# Altium PCB PCB2.PcbDoc
Units mm, origin at the board's own origin, x right, y up, seen from the top; angles counter-clockwise.
Board outline 152.4 x 101.6 mm, 2 copper layers (Top Layer, Bottom Layer); 30 components, 23 nets, 106 pads, 6 vias.
Unrouted connection lines stored in the file: 1.
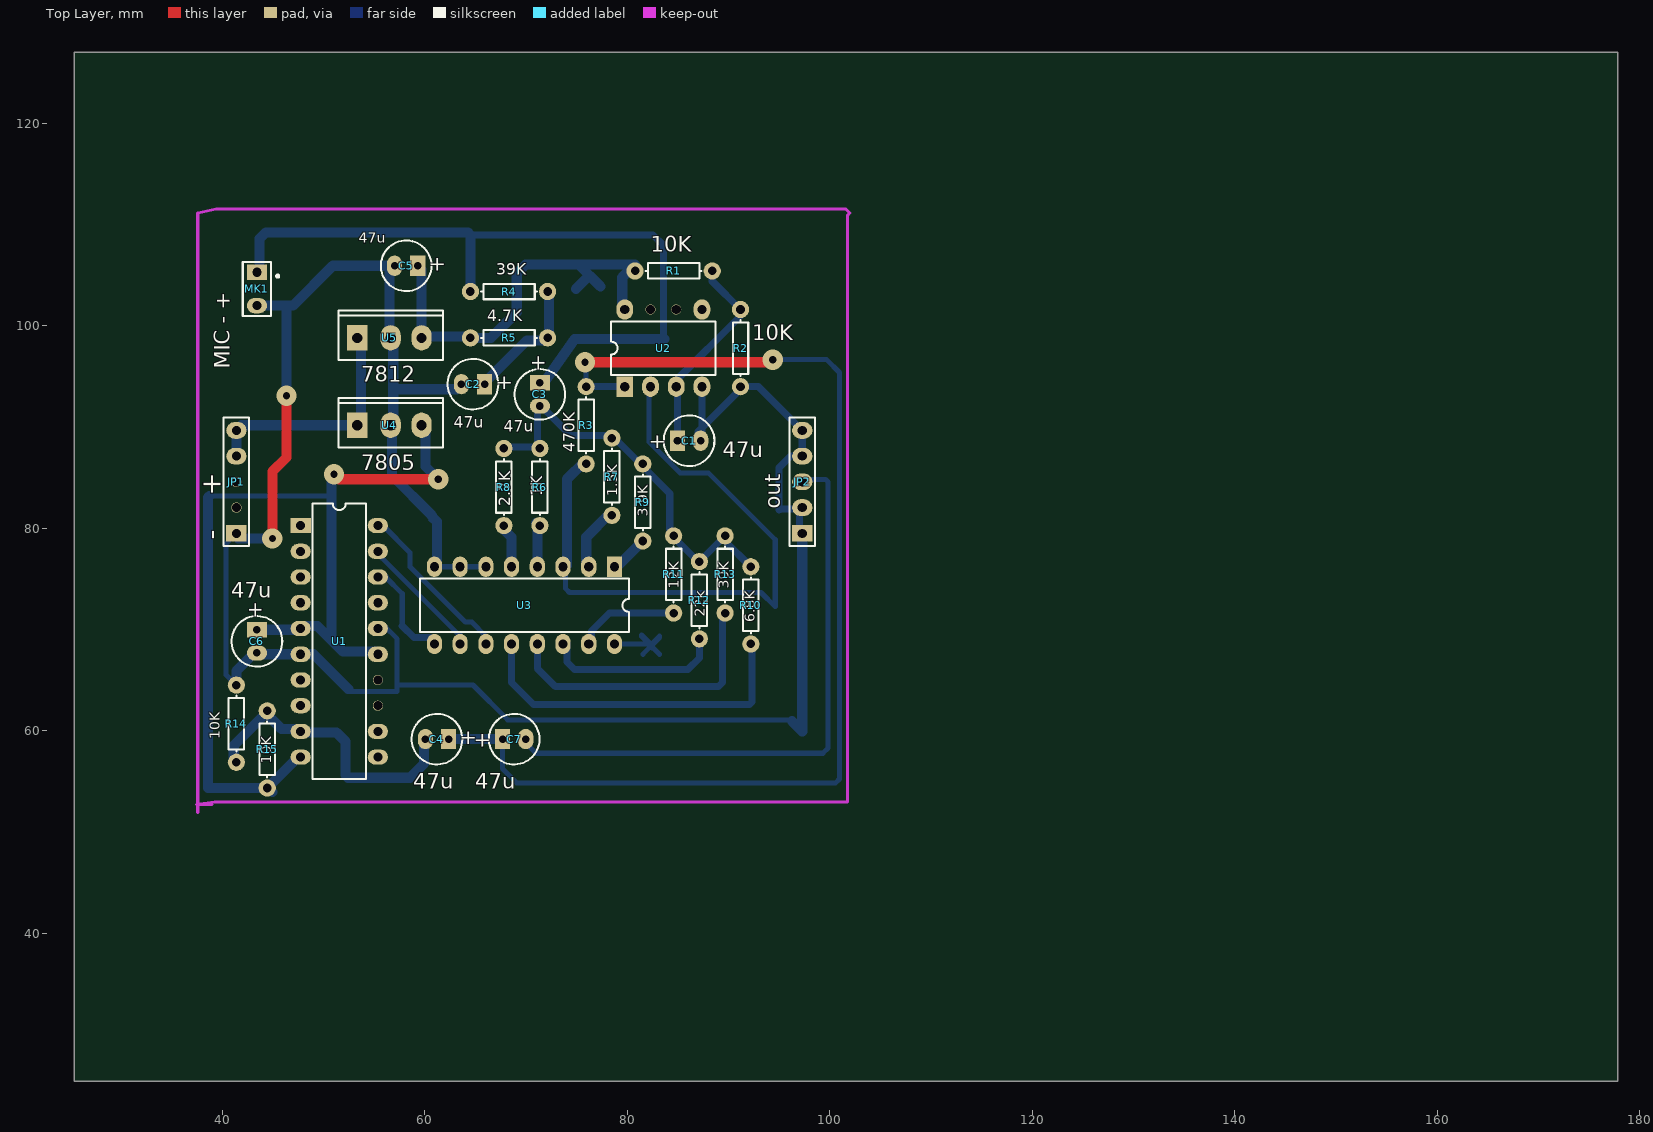
[diagram p0: Top Layer view]
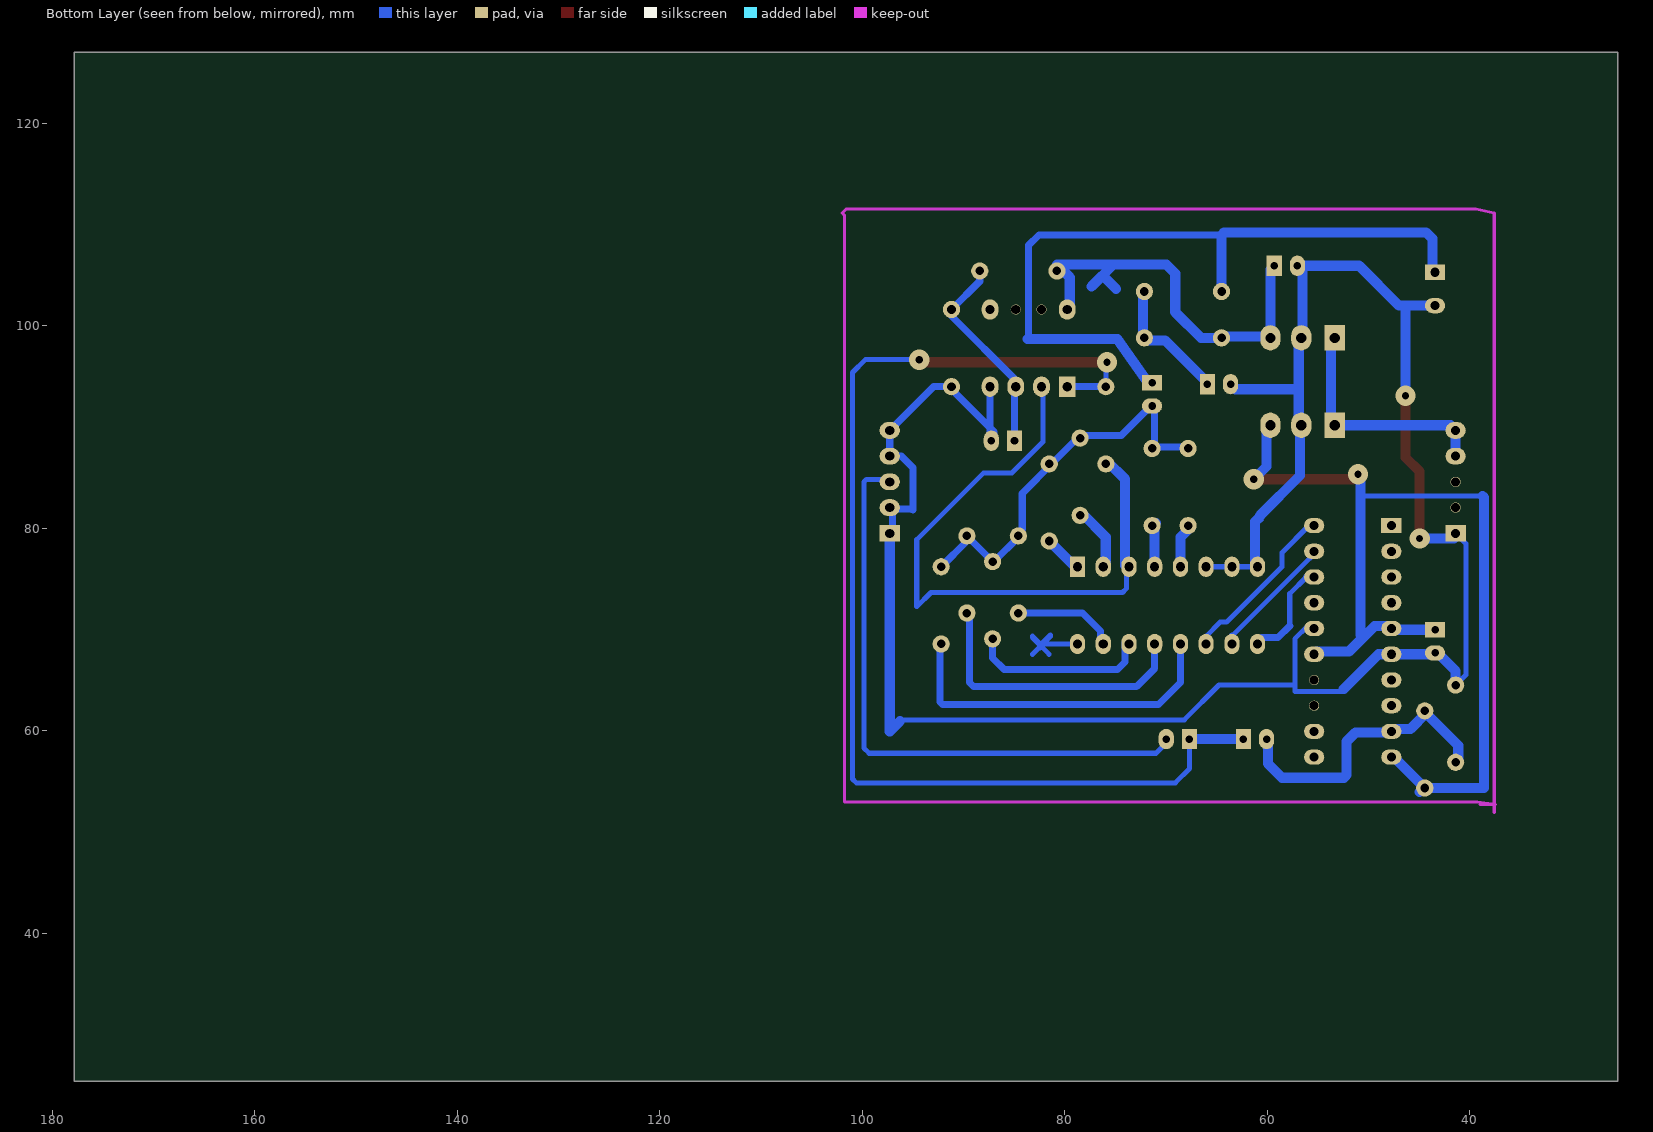
[diagram p1: Bottom Layer view, seen from below]

## Layer stack, top to bottom
Top Layer: signal copper 0.0356
Dielectric: dielectric 0.32, FR-4, Dk 4.8
Bottom Layer: signal copper 0.0356

## Board outline
25.4,25.4 177.8,25.4 177.8,127 25.4,127

## Design rules (kind name [scope] priority, off if disabled: settings)
Clearance [All] p1: gap=0.35
ComponentClearance [All] p1: gap=0.254 collisioncheckmode=0
PolygonConnect [All] p1: connectstyle=Relief reliefconductorwidth=0.254 reliefentries=4 polygonreliefangle="90 Angle"
RoomDefinition Sheet2 [InComponentClass('Sheet2')] p1: confinementstyle=ConfineIn formatcopy=TRUE outline 0,0 50.8,0 50.8,25.4 0,25.4
RoutingLayers [All] p1: top layer=Horizontal bottom layer=Vertical
RoutingVias [All] p1: holewidth=0.711 width=1.27 viastyle="Through Hole" minholewidth=0.711 minwidth=1.27 maxholewidth=0.711 maxwidth=1.27
SolderMaskExpansion [All] p1: expansion=0.102
TestPointUsage [All] p1: valid=0 allowmultiple=FALSE
Testpoint [All] p1: side=15 testpointundercomponent=TRUE minsize=1.016 maxsize=2.54 preferedsize=1.524 minholesize=0 maxholesize=1.016 preferedholesize=0.813 testpointgrid=0.025 style=1023 order=1234567890
Width [All] p1: maxlimit=2 minlimit=0.35 preferedwidth=1
16 further rules are at their usual default settings.

## Components (designator, comment, footprint, x,y, rotation, side; value= is the part's Value field where it differs from the comment)
C1 "47u" CAPPR2-5X6.8 86.106,88.646 r0 top
C2 "47u" CAPPR2-5X6.8 64.77,94.234 r180 top
C3 "47u" CAPPR2-5X6.8 71.374,93.218 r270 top
C4 "47u" CAPPR2-5X6.8 61.214,59.182 r180 top
C5 "47u" CAPPR2-5X6.8 58.166,105.918 r180 top
C6 "47u" CAPPR2-5X6.8 43.434,68.834 r270 top
C7 "47u" CAPPR2-5X6.8 68.834,59.182 r0 top
JP1 "-    +" HDR1X5#1 41.402,79.502 r90 top
JP2 "out" HDR1X5#2 97.282,79.502 r90 top
MK1 "MIC - +" PIN2 43.434,104.902 r270 top
R1 "10K" AXIAL-0.3 84.582,105.41 r180 top
R2 "10K" AXIAL-0.3 91.186,97.79 r90 top
R3 "470K" AXIAL-0.3 75.946,90.17 r90 top
R4 "39K" AXIAL-0.3 68.326,103.378 r180 top
R5 "4.7K" AXIAL-0.3 68.326,98.806 r0 top
R6 "1K" AXIAL-0.3 71.374,84.074 r90 top
R7 "1.5K" AXIAL-0.3 78.486,85.09 r90 top
R8 "2.7K" AXIAL-0.3 67.818,84.074 r90 top
R9 "3.9K" AXIAL-0.3 81.534,82.55 r90 top
R10 "6.8K" AXIAL-0.3 92.202,72.39 r90 top
R11 "12K" AXIAL-0.3 84.582,75.438 r90 top
R12 "22k" AXIAL-0.3 87.122,72.898 r90 top
R13 "39K" AXIAL-0.3 89.662,75.438 r90 top
R14 "10K" AXIAL-0.3 41.402,60.706 r270 top
R15 "10K" AXIAL-0.3 44.45,58.166 r90 top
U1 "ATtiny26L-8PI" 20P3 51.562,68.834 r270 top
U2 "MC4558ACP1" 626-05 83.566,97.79 r0 top
U3 "CD4051BCN" N16E 69.85,72.39 r180 top
U4 "7805" 221A-09 56.642,90.17 r0 top
U5 "7812" 221A-09 56.642,98.806 r0 top

## Footprints (in the part's own frame and the unit in brackets; to place one, negate y for a bottom-side part, rotate by r counter-clockwise, add the part's x,y. Pads: shape width x height; smd on the part's side, far side on the other; paste and mask are expansions set on the pad)
20P3 [mm]
  rect 1.5x2 hole 0.9: 1(-11.43,-3.81)
  oval 1.5x2 hole 0.9: 2(-8.89,-3.81) 3(-6.35,-3.81) 4(-3.81,-3.81) 5(-1.27,-3.81) 6(1.27,-3.81) 7(3.81,-3.81) 8(6.35,-3.81) 9(8.89,-3.81) 10(11.43,-3.81) 11(11.43,3.81) 12(8.89,3.81) 15(1.27,3.81) 16(-1.27,3.81) 17(-3.81,3.81) 18(-6.35,3.81) 19(-8.89,3.81) 20(-11.43,3.81)
  round 1 hole 0.9: 13(6.35,3.81) 14(3.81,3.81)
  silkscreen extent -13.6,-2.65 13.6,2.65
221A-09 [mm]
  rect 2x2.5 hole 1: 1(-3.302,0)
  oval 2x2.5 hole 1: 2(0,0) 3(3.048,0)
  silkscreen extent -5.15,-2.2 5.15,2.7
626-05 [mm]
  rect 1.65x2 hole 0.9: 1(-3.81,-3.81)
  oval 1.65x2 hole 0.9: 2(-1.27,-3.81) 3(1.27,-3.81) 4(3.81,-3.81) 5(3.81,3.81) 8(-3.81,3.81)
  round 1 hole 0.9: 6(1.27,3.81) 7(-1.27,3.81)
  silkscreen extent -5.15,-2.65 5.15,2.65
AXIAL-0.3 [mm]
  round 1.7 hole 0.85: 1(-3.81,0) 2(3.81,0)
  silkscreen extent -2.77,-0.76 2.77,0.76
CAPPR2-5X6.8 [mm]
  rect 1.5x2 hole 0.75: 1(-1.143,0)
  oval 1.5x2 hole 0.75: 2(1.143,0)
  silkscreen extent -2.5,-2.5 2.5,2.5
HDR1X5#1 [mm]
  rect 1.65x2 hole 0.9: 1(0,0)
  round 1 hole 0.9: 2(2.54,0) 3(5.08,0)
  oval 1.65x2 hole 0.9: 4(7.62,0) 5(10.16,0)
  silkscreen extent -1.27,-1.27 11.43,1.27
HDR1X5#2 [mm]
  rect 1.65x2 hole 0.9: 1(0,0)
  oval 1.65x2 hole 0.9: 2(2.54,0) 3(5.08,0) 4(7.62,0) 5(10.16,0)
  silkscreen extent -1.27,-1.27 11.43,1.27
N16E [mm]
  rect 1.5x2 hole 0.9: 1(-8.89,-3.81)
  oval 1.5x2 hole 0.9: 2(-6.35,-3.81) 3(-3.81,-3.81) 4(-1.27,-3.81) 5(1.27,-3.81) 6(3.81,-3.81) 7(6.35,-3.81) 8(8.89,-3.81) 9(8.89,3.81) 10(6.35,3.81) 11(3.81,3.81) 12(1.27,3.81) 13(-1.27,3.81) 14(-3.81,3.81) 15(-6.35,3.81) 16(-8.89,3.81)
  silkscreen extent -10.3,-2.65 10.3,2.65
PIN2 [mm]
  rect 1.5x2 hole 0.9: 1(-0.381,0)
  oval 1.5x2 hole 0.9: 2(2.921,0)
  silkscreen extent -1.4,-1.4 3.94,2.18

## Part data
C1 C2 C3 C4 C5 C6 C7: library part "Cap Pol1", "Polarized Capacitor (Radial)"
JP1 JP2: library part "Header 5", "Header, 5-Pin"
MK1: library part Mic2, "Microphone"
R1 R2 R3 R4 R5 R6 R7 R8 R9 R10 R11 R12 R13 R14 R15: library part Res1, "Resistor"
U1: "8-Bit AVR Microcontroller with 2K Bytes of Flash Memory"
U2: "Dual High-Frequency Operational Amplifier"
U3: "8-Channel Analog Multiplexer/Demultiplexer"
U4 U5: library part MC78M05ACT, "Three-Terminal Medium Current Positive Voltage Regulator"

## Via types
v1: diameter 2, hole 0.711, Top Layer to Bottom Layer, 6 vias

## Nets (pads, with @x,y where several pads share a name; then routed paths per layer and width w, separated by ;. In a path a pad name is that pad's centre, name@x,y a point inside that pad or via, vN(x,y) a via of type N, cw(c..) or ccw(c..) an arc to the next point about the centre after c; other vN are vias at no path point)
GND: C1.2 C2.2 C5.2 C6.2 JP1.1 JP2.1 JP2.2 JP2.4 JP2.5 MK1.2 R2.1 R14.1 U1.6 U1.16 U2.4 U3.6 U3.7 U3.8 U4.2 U5.2 | length 223.6
  Top Layer w1: v1(44.958,78.994) 44.958,85.598 46.355,86.995 v1(46.355,93.091)
  Bottom Layer w0.5: R14.1@41.021,64.897 40.386,65.532 40.386,78.486 JP1.1 ; 52.451,64.135 52.705,63.881 57.277,63.881 57.277,69.088 56.007,70.358 U1.16@55.499,70.358 ; 57.277,64.516 64.77,64.516 68.199,61.087 96.139,61.087 96.266,60.96 ; U3.8@60.706,76.454 U3.8@60.706,76.835 ; 60.706,81.153 60.706,81.28 ; U3.8 U3.6
  Bottom Layer w0.7: U2.4 87.376,89.154 86.995,88.773 86.995,89.535 91.44,93.98 92.964,93.98 JP2.5 JP2.4 96.139,87.122 94.996,85.979 94.996,81.788 95.123,81.915 97.028,81.915 JP2.1@97.028,79.375
  Bottom Layer w1: JP1.1@41.231,79.331 41.568,78.994 v1(44.958,78.994) ; R14.1 41.402,65.913 43.053,67.564 U1.6 49.022,67.564 52.451,64.135 ; MK1.2 46.99,101.981 50.927,105.918 C5.2 56.515,105.41 56.515,98.552 56.896,98.171 U4.2@56.896,89.916 ; v1(46.355,93.091) 46.355,101.727 ; U4.2@56.769,89.535 56.769,85.217 60.706,81.28 ; 56.896,93.726 63.119,93.726 C2.2 ; 60.706,81.153 61.214,80.645 U3.8@61.214,76.835 ; 96.266,60.96 97.282,59.944 JP2.1
NetC1_1: C1.1 R1.1 R2.2 U2.3 | length 20.6
  Bottom Layer w0.7: C1.1 84.963,93.599 84.836,93.726 84.836,94.615 91.186,100.965 R2.2 88.392,104.394 R1.1
NetC2_1: C2.1 R4.1 R5.2 | length 12.9
  Bottom Layer w1: C2.1 65.913,94.361 70.104,98.552 R5.2@72.136,98.552 ; R4.1@72.009,103.632 72.263,103.378 R5.2@72.263,98.933
NetC3_1: C3.1 MK1.1 R4.2 | length 73.6
  Bottom Layer w0.7: 64.516,108.966 82.55,108.966 83.566,107.95 83.566,98.806 83.693,98.679
  Bottom Layer w1: MK1.1@43.688,105.156 43.688,108.585 44.323,109.22 64.262,109.22 64.516,108.966 R4.2 ; C3.1 71.755,94.361 74.803,98.679 76.073,98.679 83.693,98.679
NetC3_2: C3.2 R6.2 R7.2 R8.2 R9.2 R10.2 R11.2 R12.2 R13.2 | length 39.5
  Bottom Layer w0.7: R8.2@67.691,88.011 71.247,88.011 71.12,88.138 71.12,91.567 71.374,91.821 71.755,91.821 74.422,89.154 78.486,89.154 81.153,86.487 84.201,83.439 84.201,79.883 84.582,79.502 84.582,79.121 86.995,76.708 R12.2 R13.2 89.662,78.74 R10.2
NetC4_1: C4.1 C7.1 R3.2 U2.1 | length 114.5
  Top Layer w1: v1(75.819,96.393) 94.107,96.393 v1(94.361,96.647)
  Bottom Layer w0.5: C7.1 67.691,56.261 69.088,54.864 100.584,54.864 100.965,55.245 100.965,95.377 99.695,96.647 v1(94.361,96.647) ; v1(75.819,96.393) 75.946,96.266 R3.2
  Bottom Layer w0.7: R3.2 U2.1
  Bottom Layer w1: C4.1 C7.1
NetC4_2: C4.2 R14.2 R15.2 U1.9 | length 28.8
  Bottom Layer w1: R14.2@41.148,57.277 41.148,58.547 44.323,61.722 45.847,60.198 47.244,60.198 47.498,59.944 U1.9 ; U1.9@48.006,59.817 51.308,59.817 52.197,58.928 52.197,55.626 52.451,55.372 58.547,55.372 59.944,56.769 C4.2@59.944,59.309
NetC5_1: C5.1 R1.2 R5.1 U2.8 U3.16 U5.3 | length 55.2
  Bottom Layer w0.5: R5.1@64.389,98.933 R5.1 ; U3.16 82.042,68.58 82.423,68.199 82.423,68.58 83.185,69.342 83.185,69.215 81.534,67.564 ; 82.288,68.318 82.288,68.588 81.407,69.469 81.407,69.342 83.185,67.564
  Bottom Layer w1: C5.1 59.69,105.537 U5.3@59.69,99.06 ; U5.3@59.436,98.933 R5.1@64.389,98.933 ; R5.1 66.548,98.806 69.088,101.346 69.088,105.156 69.977,106.045 80.772,106.045 79.502,104.775 U2.8@79.502,101.854 ; 74.93,103.632 76.225,104.927 76.225,105.004 ; 75.184,106.045 77.343,103.886
NetC7_2: C7.2 JP2.3 | length 59.5
  Bottom Layer w0.5: C7.2@69.85,58.928 70.993,57.785 99.314,57.785 99.822,58.293 99.822,84.582 99.568,84.836 JP2.3@97.409,84.836
NetJP1_4: JP1.4 JP1.5 U4.1 U5.1 | length 23.4
  Bottom Layer w1: JP1.4 JP1.5 41.91,90.17 U4.1 53.721,90.551 U5.1@53.721,98.679
NetR3_1: R3.1 U2.2 U3.3 | length 63
  Bottom Layer w0.5: U3.3 73.914,75.946 73.914,74.041 74.295,73.66 93.218,73.66 94.615,72.263 94.615,78.867 88.011,85.471 85.217,85.471 82.169,88.519 U2.2@82.169,93.726
  Bottom Layer w1: U3.3@74.041,76.327 74.041,84.836 R3.1@75.819,86.614
NetR6_1: R6.1 U3.4 | length 4.4
  Bottom Layer w1: R6.1@70.993,80.518 71.12,80.391 U3.4
NetR7_1: R7.1 U3.2 | length 5.6
  Bottom Layer w1: U3.2@75.946,76.708 75.946,79.121 R7.1@78.232,81.407
NetR8_1: R8.1 U3.5 | length 4.4
  Bottom Layer w1: R8.1@67.564,80.137 68.58,79.121 U3.5
NetR9_1: R9.1 U3.1 | length 3.7
  Bottom Layer w1: U3.1@78.994,76.073 78.994,76.2 R9.1
NetR10_1: R10.1 U3.12 | length 34
  Bottom Layer w0.7: U3.12 68.58,64.77 70.739,62.611 92.075,62.611 92.329,62.865 R10.1@92.329,68.326
NetR11_1: R11.1 U3.15 | length 9.5
  Bottom Layer w0.7: U3.15@76.454,68.834 76.454,69.85 78.232,71.628 R11.1@84.201,71.628
NetR12_1: R12.1 U3.14 | length 17.7
  Bottom Layer w0.7: U3.14@74.041,68.707 74.041,66.802 74.803,66.04 85.979,66.04 87.122,67.183 R12.1
NetR13_1: R13.1 U3.13 | length 28.9
  Bottom Layer w0.7: U3.13 71.12,66.167 72.898,64.389 89.027,64.389 89.408,64.77 89.408,71.374 R13.1@89.916,71.882
NetU1_18: U1.18 U3.9 | length 9.5
  Bottom Layer w0.5: U1.18@56.134,75.184 57.785,73.533 57.785,70.358
  Bottom Layer w0.7: U1.18 U1.18@56.134,75.184 ; 57.785,70.358 58.928,69.215 U3.9@60.579,69.215
NetU1_19: U1.19 U3.10 | length 12.1
  Bottom Layer w0.5: U1.19@55.753,77.978 55.753,77.089 U3.10@63.5,69.342
  Bottom Layer w0.7: U3.10@63.5,69.088 U3.10@63.5,69.342
NetU1_20: U1.20 U3.11 | length 16
  Bottom Layer w0.5: U1.20 55.88,80.264 58.547,77.597 58.547,76.2 64.008,70.739 64.643,70.739 U3.11@66.04,69.342
VCC: C6.1 R15.1 U1.5 U1.10 U1.15 U4.3 | length 96.9
  Top Layer w1: v1(51.054,85.344) 51.562,84.836 v1(61.341,84.836)
  Bottom Layer w0.5: 38.735,83.185 50.927,83.185 51.054,83.058
  Bottom Layer w1: 38.735,83.185 38.592,83.042 38.592,54.356 R15.1 U1.10@47.498,57.404 ; C6.1 47.371,69.977 47.752,70.358 49.403,70.358 51.943,67.818 U1.15@55.118,67.818 ; R15.1@44.704,54.229 R15.1@44.974,53.959 ; 50.8,69.469 50.8,83.058 ; 50.8,83.185 50.8,84.582 51.054,84.836 v1(51.054,85.344) ; U4.3@60.071,90.17 60.071,86.106 v1(61.341,84.836)
pads on no net: JP1.2 JP1.3 U1.1 U1.2 U1.3 U1.4 U1.7 U1.8 U1.11 U1.12 U1.13 U1.14 U1.17 U2.5 U2.6 U2.7

## Keep-outs
Keep-Out Layer:
  lines w0.3: 37.592,51.943 37.592,111.125 39.37,111.506 101.6,111.506 101.981,111.125 101.727,110.871 101.727,70.231 101.727,69.596 101.727,52.959 39.243,52.959 37.465,52.705 38.989,52.705

## Text inside footprints (layer, text, board x,y; h text height)
C1: Top Overlay "+" at 82.131,87.896 h1.5
C2: Top Overlay "+" at 68.745,94.984 h1.5 r180
C3: Top Overlay "+" at 70.624,97.193 h1.5 r270
C4: Top Overlay "+" at 65.189,59.932 h1.5 r180
C5: Top Overlay "+" at 62.141,106.668 h1.5 r180
C6: Top Overlay "+" at 42.684,72.809 h1.5 r270
C7: Top Overlay "+" at 64.859,58.432 h1.5